# Altium PCB eqVcVersion1.PcbDoc
Units mm, origin at the board's own origin, x right, y up, seen from the top; angles counter-clockwise.
Board outline 185.67 x 159.89 mm, 2 copper layers (Top Layer, Bottom Layer); 127 components, 83 nets, 325 pads, 49 vias.
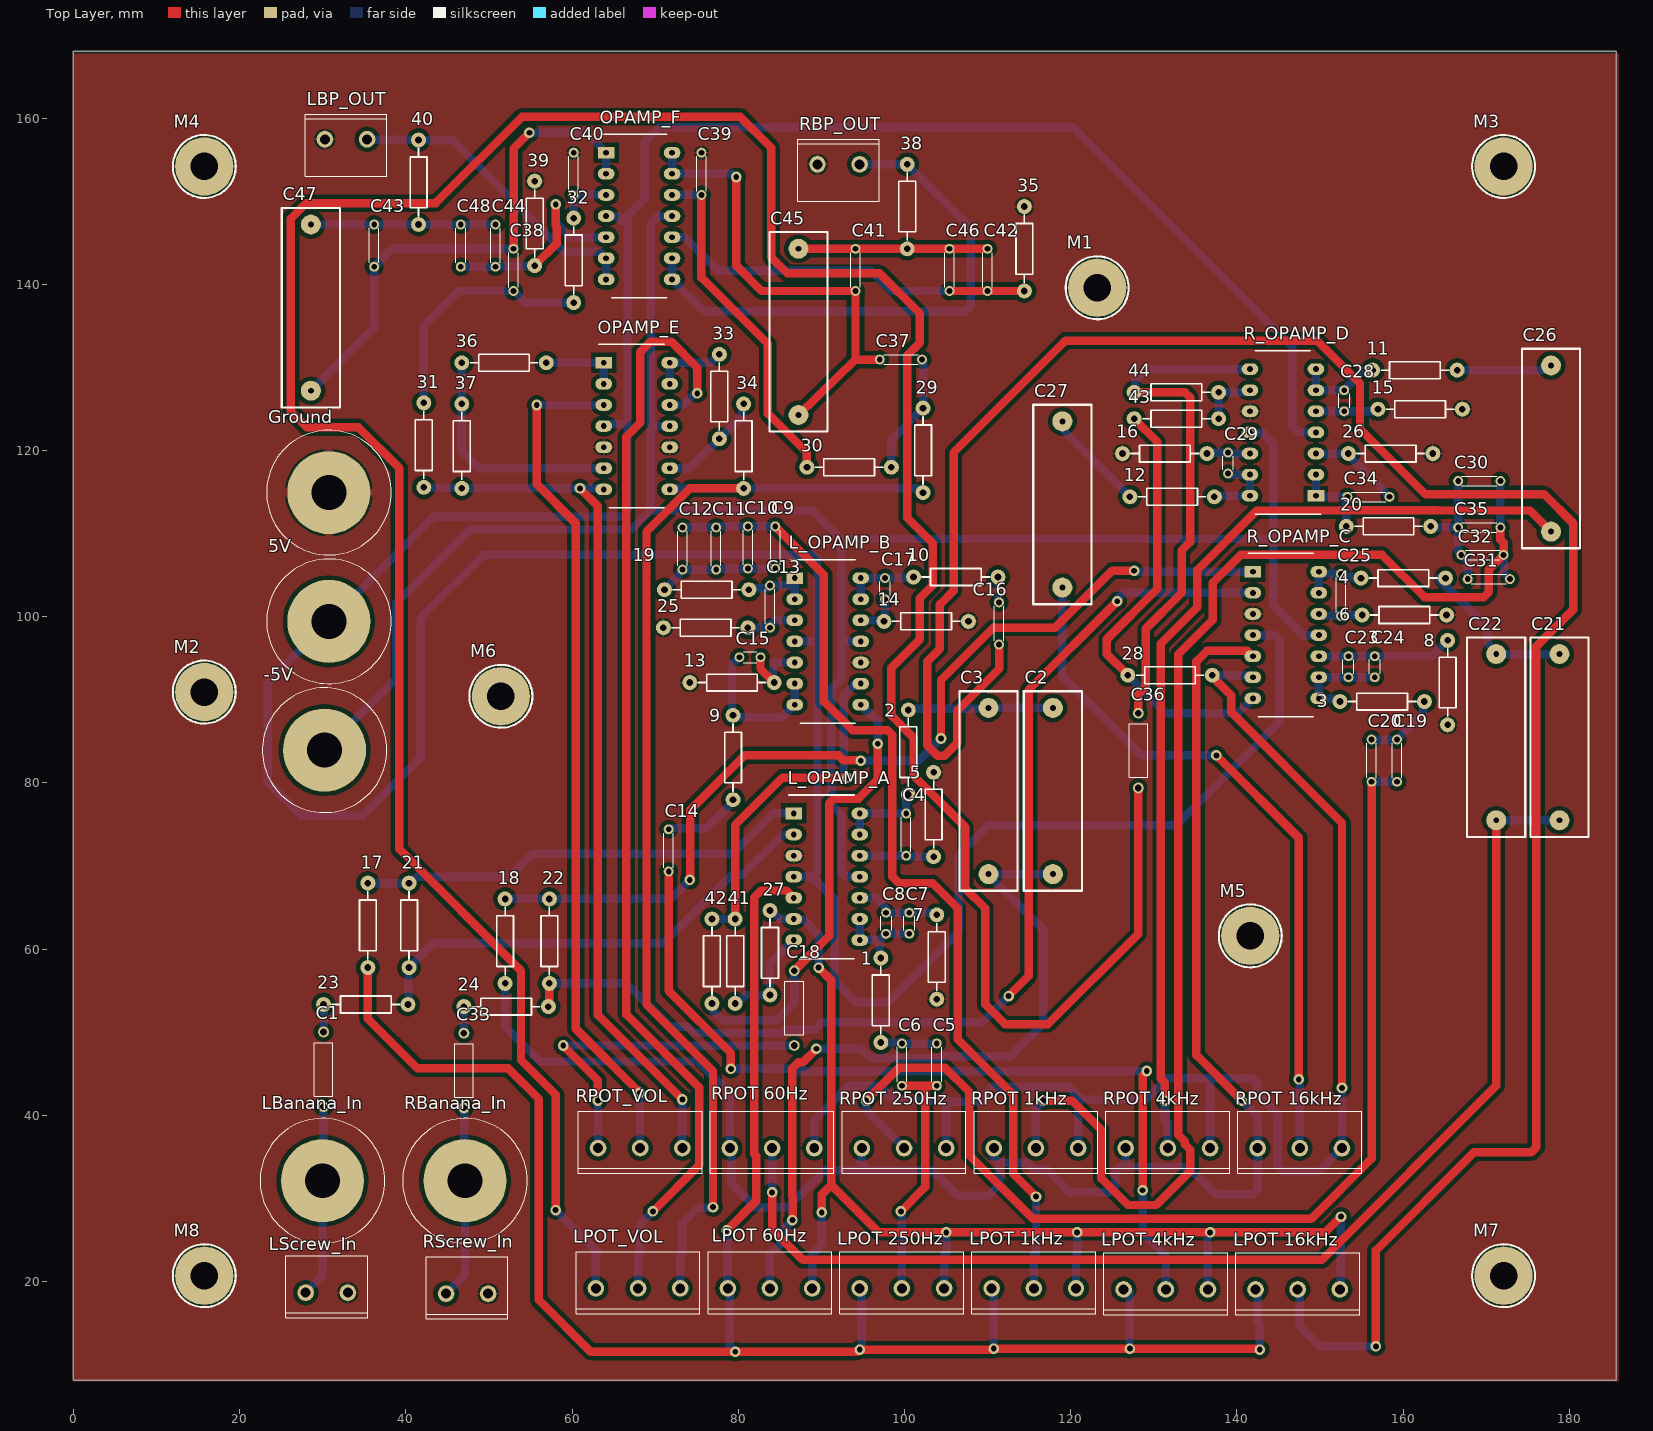
[diagram p0: Top Layer view]
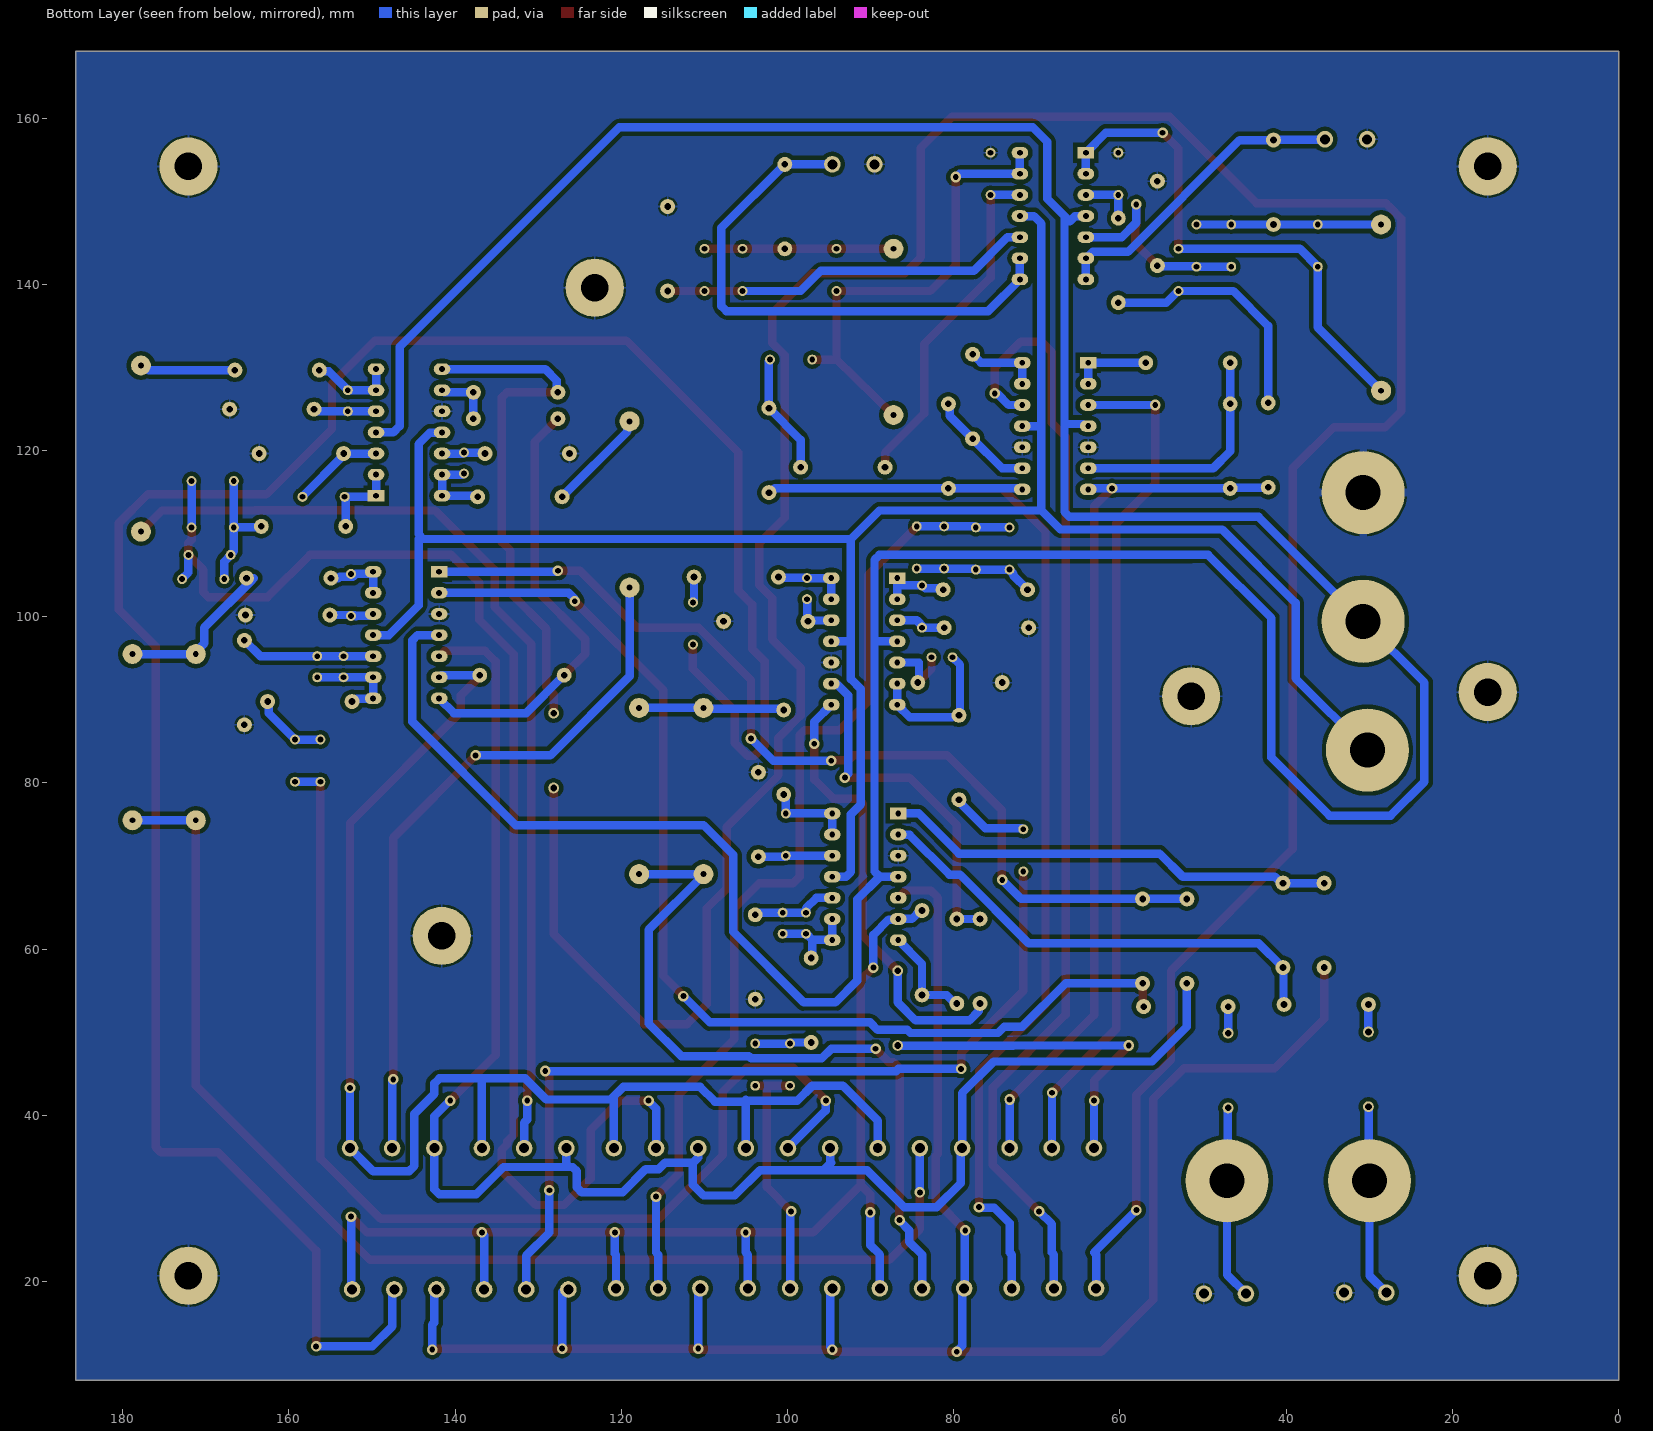
[diagram p1: Bottom Layer view, seen from below]

## Layer stack, top to bottom
Top Solder: solder mask 0.0102, Solder Resist, Dk 3.5
Top Layer: signal copper 0.0356
Dielectric 1: dielectric 0.32, FR-4, Dk 4.8
Bottom Layer: signal copper 0.0356
Bottom Solder: solder mask 0.0102, Solder Resist, Dk 3.5

## Board outline
0,8.128 185.674,8.128 185.674,168.021 0,168.021

## Design rules (kind name [scope] priority, off if disabled: settings)
Clearance [All] p1: gap=0.508 ignorepadtopadclearanceinfootprint=FALSE
PolygonConnect [All] p1: connectstyle=Relief reliefconductorwidth=0.254 reliefentries=4 polygonreliefangle="90 Angle" airgapwidth=0.254
RoutingVias [All] p1: holewidth=0.711 width=1.27 viastyle="Through Hole" minholewidth=0.711 minwidth=1.27 maxholewidth=0.711 maxwidth=1.27
SolderMaskExpansion [All] p1: expansion=0.102 istentingtop=FALSE
Width [All] p1: maxlimit=1.016 minlimit=1.016 preferedwidth=1.016 minimp=50.000000 maximp=50.000000 favimp=50.000000
30 further rules are at their usual default settings.

## Classes and differential pairs
component class voltageControl: 29 30 31 32 33 34 35 36 37 38 39 40 C37 C38 C39 C40 C41 C42 C43 C44 C45 C46 C47 C48 LBP_OUT LPOT_VOL OPAMP_E OPAMP_F RBP_OUT RPOT_VOL
component class equalizer: 1 2 3 4 5 5V 6 7 8 9 10 11 12 13 14 15 16 17 18 19 20 21 22 23 24 25 26 27 28 41 42 43 44 -5V C1 C2 C3 C4 C5 C6 C7 C8 C9 C10 C11 C12 C13 C14 C15 C16 C17 C18 C19 C20 C21 C22 C23 C24 C25 C26 C27 C28 C29 C30 C31 C32 C33 C34 C35 C36 Ground L_OPAMP_A L_OPAMP_B LBanana_In "LPOT 1kHz" "LPOT 4kHz" "LPOT 16kHz" "LPOT 60Hz" "LPOT 250Hz" LScrew_In M1 M2 M3 M4 M5 M6 M7 M8 R_OPAMP_C R_OPAMP_D RBanana_In "RPOT 1kHz" "RPOT 4kHz" "RPOT 16kHz" "RPOT 60Hz" "RPOT 250Hz" RScrew_In

## Components (designator, comment, footprint, x,y, rotation, side; value= is the part's Value field where it differs from the comment)
1 "Res2" "AXIAL-0.4 PCBK" 97.155,53.848 r90 top value=475
2 "Res2" "AXIAL-0.4 PCBK" 100.457,83.693 r270 top value=475
3 "Res2" "AXIAL-0.4 PCBK" 157.48,89.789 r180 top value=475
4 "Res2" "AXIAL-0.4 PCBK" 160.02,104.648 r180 top value=475
5 "Res2" "AXIAL-0.4 PCBK" 103.505,76.2 r270 top value=100k
5V "Banana Plug" "Banana Plug On top" 30.734,99.441 r0 top
6 "Res2" "AXIAL-0.4 PCBK" 160.147,100.203 r180 top value=100k
7 "Res2" "AXIAL-0.4 PCBK" 103.886,59.055 r90 top value=100k
8 "Res2" "AXIAL-0.4 PCBK" 165.354,92.075 r90 top value=100k
9 "475" "AXIAL-0.4 PCBK" 79.375,83.058 r90 top value=100
10 "Res2" "AXIAL-0.4 PCBK" 106.172,104.775 r180 top value=475
11 "Res2" "AXIAL-0.4 PCBK" 161.417,129.667 r180 top value=475
12 "Res2" "AXIAL-0.4 PCBK" 132.207,114.427 r0 top value=475
13 "Res2" "AXIAL-0.4 PCBK" 79.248,92.075 r0 top value=100k
14 "Res2" "AXIAL-0.4 PCBK" 102.616,99.441 r180 top value=100k
15 "Res2" "AXIAL-0.4 PCBK" 162.052,124.968 r180 top value=100k
16 "Res2" "AXIAL-0.4 PCBK" 131.318,119.634 r0 top value=100k
17 "Res2" "AXIAL-0.4 PCBK" 35.433,62.865 r270 top value=100
18 "Res2" "AXIAL-0.4 PCBK" 51.943,60.96 r270 top value=3.32k
19 "Res2" "AXIAL-0.4 PCBK" 76.2,103.251 r0 top value=475
20 "Res2" "AXIAL-0.4 PCBK" 158.242,110.871 r180 top value=475
21 "Res2" "AXIAL-0.4 PCBK" 40.386,62.865 r90 top value=100k
22 "Res2" "AXIAL-0.4 PCBK" 57.277,60.96 r90 top value=100k
23 "Res2" "AXIAL-0.4 PCBK" 35.179,53.34 r0 top value=100k
24 "Res2" "AXIAL-0.4 PCBK" 52.07,53.086 r0 top value=100k
25 "Res2" "AXIAL-0.4 PCBK" 76.073,98.679 r0 top value=100k
26 "Res2" "AXIAL-0.4 PCBK" 158.496,119.634 r180 top value=100k
27 "Res2" "AXIAL-0.4 PCBK" 83.82,59.563 r270 top value=3.32k
28 "Res2" "AXIAL-0.4 PCBK" 131.953,92.964 r180 top value=3.32k
29 "Res2" "AXIAL-0.4 PCBK" 102.235,120.015 r90 top value=3.92k
30 "Res2" "AXIAL-0.4 PCBK" 93.345,117.983 r180 top value=7.32k
31 "Res2" "AXIAL-0.4 PCBK" 42.164,120.65 r90 top value=3.92k
32 "Res2" "AXIAL-0.4 PCBK" 60.198,142.875 r90 top value=7.32k
33 "Res2" "AXIAL-0.4 PCBK" 77.724,126.492 r270 top value=1k
34 "Res2" "AXIAL-0.4 PCBK" 80.645,120.523 r270 top value=649
35 "Res2" "AXIAL-0.4 PCBK" 114.427,144.272 r270 top value=7.87k
36 "Res2" "AXIAL-0.4 PCBK" 51.816,130.556 r180 top value=1k
37 "Res2" "AXIAL-0.4 PCBK" 46.736,120.523 r270 top value=649
38 "Res2" "AXIAL-0.4 PCBK" 100.33,149.352 r90 top value=3.92k
39 "Res2" "AXIAL-0.4 PCBK" 55.499,147.32 r270 top value=7.87k
40 "Res2" "AXIAL-0.4 PCBK" 41.529,152.273 r90 top value=3.92k
41 "Res2" "AXIAL-0.4 PCBK" 79.629,58.547 r90 top value=200
42 "Res2" "AXIAL-0.4 PCBK" 76.835,58.547 r270 top value=100
43 "Res2" "AXIAL-0.4 PCBK" 132.715,123.825 r0 top value=200
44 "Res2" "AXIAL-0.4 PCBK" 132.715,127 r180 top value=100
-5V "Banana Plug" "Banana Plug On top" 30.226,83.947 r0 top
C1 "Cap" "RES THT 9mm" 30.099,50.038 r270 top
C2 "Cap" "Cap 20mm" 117.856,69.027 r90 top
C3 "Cap" "Cap 20mm" 110.109,69.027 r90 top
C4 "Cap" Cap-1 100.203,71.247 r90 top
C5 "Cap" Cap-1 103.886,48.641 r270 top
C6 "Cap" Cap-1 99.695,48.641 r270 top
C7 "Cap" Cap-0 100.584,64.389 r270 top
C8 "Cap" Cap-0 97.79,64.389 r270 top
C9 "Cap" Cap-1 84.455,110.871 r270 top
C10 "Cap" Cap-1 81.153,110.871 r270 top
C11 "Cap" Cap-1 77.343,110.744 r270 top
C12 "Cap" Cap-1 73.279,110.744 r270 top
C13 "Cap" Cap-1 83.82,98.679 r90 top
C14 "Cap" Cap-1 71.628,69.342 r90 top
C15 "Cap" Cap-0 82.677,95.123 r180 top
C16 "Cap" Cap-1 111.379,96.647 r90 top
C17 "Cap" Cap-0 97.663,102.108 r90 top
C18 "Cap" "RES THT 9mm" 86.741,48.404 r90 top
C19 "Cap" Cap-1 159.258,85.217 r270 top
C20 "Cap" Cap-1 156.21,85.217 r270 top
C21 "Cap" "Cap 20mm" 178.816,75.504 r90 top
C22 "Cap" "Cap 20mm" 171.196,75.504 r90 top
C23 "Cap" Cap-0 153.416,95.25 r270 top
C24 "Cap" Cap-0 156.591,95.25 r270 top
C25 "Cap" Cap-1 152.527,100.076 r90 top
C26 "Cap" "Cap 20mm" 177.8,110.236 r90 top
C27 "Cap" "Cap 20mm" 118.999,103.505 r90 top
C28 "Cap" Cap-0 152.908,124.714 r90 top
C29 "Cap" Cap-0 138.938,119.761 r270 top
C30 "Cap" Cap-1 171.704,116.332 r180 top
C31 "Cap" Cap-1 172.847,104.521 r180 top
C32 "Cap" Cap-1 172.085,107.442 r180 top
C33 "Cap" "RES THT 9mm" 46.99,49.894 r270 top
C34 "Cap" Cap-1 158.369,114.427 r180 top
C35 "Cap" Cap-1 171.704,110.744 r180 top
C36 "Cap" "RES THT 9mm" 128.143,79.392 r90 top
C37 "Cap" Cap-1 102.108,130.937 r180 top
C38 "Cap" Cap-1 52.959,139.192 r90 top
C39 "Cap" Cap-1 75.565,155.829 r270 top
C40 "Cap" Cap-1 60.198,155.829 r270 top
C41 "Cap" Cap-1 94.107,139.192 r90 top
C42 "Cap" Cap-1 109.982,144.272 r270 top
C43 "Cap" Cap-1 36.195,142.113 r90 top
C44 "Cap" Cap-1 50.8,147.193 r270 top
C45 "Cap" "Cap 20mm" 87.249,124.272 r90 top
C46 "Cap" Cap-1 105.41,144.272 r270 top
C47 "Cap" "Cap 20mm" 28.575,127.193 r90 top
C48 "Cap" Cap-1 46.609,147.193 r270 top
Ground "Banana Plug" "Banana Plug On top" 30.734,114.935 r0 top
L_OPAMP_A "TLC274CNE4" DIP14 90.645,68.707 r0 top
L_OPAMP_B "TLC274CNE4" DIP14 90.772,97.028 r0 top
LBanana_In "Banana Plug" "Banana Plug On top" 29.972,32.131 r0 top
LBP_OUT "Screw 2" Screw-2 35.338,157.448 r180 top
"LPOT 1kHz" "Screw 3" Screw-3 110.49,19.177 r0 top
"LPOT 4kHz" "Screw 3" Screw-3 126.365,19.05 r0 top
"LPOT 16kHz" "Screw 3" Screw-3 142.24,19.05 r0 top
"LPOT 60Hz" "Screw 3" Screw-3 78.74,19.177 r0 top
"LPOT 250Hz" "Screw 3" Screw-3 94.615,19.177 r0 top
LPOT_VOL "Screw 3" Screw-3 62.87,19.177 r0 top
LScrew_In "Screw 2" Screw-2 27.945,18.669 r0 top
M1 "Screw Hole" "M3 Hole" 123.19,139.573 r0 top
M2 "Screw Hole" "M3 Hole" 15.748,90.932 r0 top
M3 "Screw Hole" "M3 Hole" 172.085,154.178 r0 top
M4 "Screw Hole" "M3 Hole" 15.748,154.178 r0 top
M5 "Screw Hole" "M3 Hole" 141.605,61.595 r0 top
M6 "Screw Hole" "M3 Hole" 51.435,90.424 r0 top
M7 "Screw Hole" "M3 Hole" 172.085,20.701 r0 top
M8 "Screw Hole" "M3 Hole" 15.748,20.701 r0 top
OPAMP_E "TLC274CNE4" DIP14 67.785,122.936 r0 top
OPAMP_F "TLC274CNE4" DIP14 68.072,148.209 r0 top
R_OPAMP_C "TLC274CNE4" DIP14 145.89,97.79 r0 top
R_OPAMP_D "TLC274CNE4" DIP14 145.542,122.174 r180 top
RBanana_In "Banana Plug" "Banana Plug On top" 47.117,32.131 r0 top
RBP_OUT "Screw 2" Screw-2 94.61,154.432 r180 top
"RPOT 1kHz" "Screw 3" Screw-3 110.744,36.058 r0 top
"RPOT 4kHz" "Screw 3" Screw-3 126.619,36.058 r0 top
"RPOT 16kHz" "Screw 3" Screw-3 142.494,36.058 r0 top
"RPOT 60Hz" "Screw 3" Screw-3 78.994,36.058 r0 top
"RPOT 250Hz" "Screw 3" Screw-3 94.869,36.058 r0 top
RPOT_VOL "Screw 3" Screw-3 63.129,36.068 r0 top
RScrew_In "Screw 2" Screw-2 44.836,18.542 r0 top

## Footprints (in the part's own frame and the unit in brackets; to place one, negate y for a bottom-side part, rotate by r counter-clockwise, add the part's x,y. Pads: shape width x height; smd on the part's side, far side on the other; paste and mask are expansions set on the pad)
"AXIAL-0.4 PCBK" [mm]
  round 1.8 hole 0.8: 1(-5.08,0) 2(5.08,0)
  silkscreen extent -4.06,-1.02 4.06,1.02
"Banana Plug On top" [mm] "Banana Plug"
  round 10 hole 4.2: 1(0,0)
  silkscreen extent -7.5,-7.5 7.5,7.5
"Cap 20mm" [mm] "Capacitor with 20mm hole distance (center)"
  round 2.4 hole 0.7: 1(0,0) 2(20,0)
  silkscreen extent -2,-3.5 22,3.5
Cap-0 [mm] "Capacitor with no space"
  round 1.2 hole 0.7: 1(0,0) 2(2.54,0)
  silkscreen extent 0.45,-0.65 2.1,0.65
Cap-1 [mm] "Capacitor with 1 space"
  round 1.2 hole 0.7: 1(0,0) 2(5.08,0)
  silkscreen extent 0.45,-0.58 4.62,0.58
DIP14 [mm]
  rect 2x1.4 hole 0.7: 1(-3.97,7.62)
  oval 2x1.4 hole 0.7: 2(-3.97,5.08) 3(-3.97,2.54) 4(-3.97,0) 5(-3.97,-2.54) 6(-3.97,-5.08) 7(-3.97,-7.62) 8(3.97,-7.62) 9(3.97,-5.08) 10(3.97,-2.54) 11(3.97,0) 12(3.97,2.54) 13(3.97,5.08) 14(3.97,7.62)
  silkscreen extent -4.53,-9.84 3.3,9.84
"M3 Hole" [mm]
  round 7 hole 3.3 mask+0: 1(0,0)
  silkscreen extent -3.78,-3.78 3.79,3.78
"RES THT 9mm" [mm]
  round 1.3 hole 0.8: 1(0,0) 2(9,0)
  silkscreen extent 1.27,-1.13 7.73,1.13, body extent -0.32,-1.13 9.28,1.14, height 2.36
Screw-2 [mm] "Screw Terminal with 2 connections"
  round 2 hole 1.2: 1(0,0) 2(5.075,0)
  silkscreen extent -2.38,-3.02 7.45,4.42, body extent -3.07,-3.1 7.53,4.5, height 10
Screw-3 [mm] "Screw Terminal with 3 connections"
  round 2 hole 1.2: 1(0,0) 2(5.075,0) 3(10.15,0)
  silkscreen extent -2.38,-3.02 12.52,4.42, body extent -2.95,-3.8 12.55,4, height 10.3

## Part data
1 2 3 4 5 6 7 8 9 10 11 12 13 14 15 16 17 18 19 20 21 22 23 24 25 26 27 28 29 30 31 32 33 34 35 36 37 38 39 40 41 42 43 44: library part "Res PCBK", "Resistor", LatestRevisionDate=17-Jul-2002, LatestRevisionNote="Re-released for DXP Platform.", PackageReference=AXIAL-0.4, Published=8-Jun-2000, Publisher="Altium Limited"
C1 C18 C33 C36: library part "Capacitor Polarised", Capacity=10uF
C2 C3 C21 C22: library part "Capacitor big ceramic", Capacity=3.3uF
C4 C16 C25: library part "Capacitor 1 space", Capacity=22nF
C5 C19 C42 C44: library part "Capacitor 1 space", Capacity=1uF
C6 C20: library part "Capacitor 1 space", Capacity=680nF
C7 C23: library part "Capacitor 0 space", Capacity=4.7nF
C8 C24: library part "Capacitor 0 space", Capacity=1nF
C9 C10 C11 C12 C14 C30 C31 C32 C35: library part "Capacitor 1 space", Capacity=100nF
C13 C34: library part "Capacitor 1 space", Capacity=1.2nF
C15 C28: library part "Capacitor 0 space", Capacity=390pF
C17 C29: library part "Capacitor 0 space", Capacity=85pF
C26: library part "Capacitor big ceramic", Capacity=100nF
C27: library part "Capacitor big ceramic", Capacity=22nF
C37 C38: library part "Capacitor 1 space", Capacity=2.2nF
C39 C40: library part "Capacitor 1 space", Capacity=1nF
C41 C43: library part "Capacitor 1 space", Capacity=1.5uF
C45 C47: library part "Capacitor big ceramic", Capacity=330nF
C46 C48: library part "Capacitor 1 space", Capacity=220nF
L_OPAMP_A L_OPAMP_B OPAMP_E OPAMP_F R_OPAMP_C R_OPAMP_D: "Precision Amplifiers Quad Single Supply Op Amp", Manufacturer_Name="Texas Instruments", Mouser Part Number=595-TLC274CNE4, Datasheet Link=https://www.ti.com/lit/ds/symlink/tlc274.pdf?ts=1639464334605&ref_url=https%253A%252F%252Fwww.ti.com%252Fstore%252Fti%252Fen%252Fp%252Fproduct%252F%253Fp%253DTLC274CN, Geometry.Height=5.08mm, Manufacturer_Part_Number=TLC274CNE4, Mouser Price/Stock=https://www.mouser.co.uk/ProductDetail/Texas-Instruments/TLC274CNE4?qs=Mkt%2FZhxPIiTvMsNXR1cCkw%3D%3D

## Via types
v1: diameter 1.27, hole 0.7, Top Layer to Bottom Layer, 49 vias

## Nets (pads, with @x,y where several pads share a name; then routed paths per layer and width w, separated by ;. In a path a pad name is that pad's centre, name@x,y a point inside that pad or via, vN(x,y) a via of type N, cw(c..) or ccw(c..) an arc to the next point about the centre after c; other vN are vias at no path point)
5V: 5V.1 L_OPAMP_A.4 L_OPAMP_B.4 OPAMP_E.4 OPAMP_F.4 R_OPAMP_C.4 R_OPAMP_D.4 | length 453
  Bottom Layer w1.016: OPAMP_E.4 64.219,122.936 64.473,123.19 66.548,123.19 66.675,123.317 ; OPAMP_F.4@63.997,148.187 65.427,148.187 66.04,147.574 66.675,148.209 ; L_OPAMP_A.4 88.9,68.707 ; L_OPAMP_B.4 89.281,97.028 89.535,97.282 ; R_OPAMP_C.4 144.526,97.79 145.161,97.155 145.161,87.376 132.715,74.93 110.109,74.93 106.553,71.374 106.553,62.103 98.044,53.594 94.234,53.594 91.63,56.197 91.63,65.977 88.9,68.707 ; R_OPAMP_D.4 147.447,122.174 146.685,122.936 146.685,132.461 120.269,158.877 70.485,158.877 68.766,157.158 68.766,150.3 66.675,148.209 ; 66.675,123.317 66.675,112.609 66.08,112.014 43.307,112.014 5V.1 23.368,92.075 23.368,80.137 27.432,76.073 34.798,76.073 41.783,83.058 41.783,99.822 49.399,107.438 51.304,107.438 51.308,107.442 88.94,107.442 89.535,106.847 89.535,97.282 ; 66.675,123.317 66.675,148.209 ; 88.9,68.707 89.535,69.342 89.535,97.282
-5V: -5V.1 L_OPAMP_A.11 L_OPAMP_B.11 OPAMP_E.11 OPAMP_F.11 R_OPAMP_C.11 R_OPAMP_D.11 | length 248.3
  Bottom Layer w1.016: -5V.1 38.862,92.583 38.862,101.666 47.686,110.49 67.17,110.49 69.456,112.776 ; OPAMP_E.11 69.837,122.936 69.456,122.555 ; OPAMP_F.11 70.358,148.209 69.456,147.307 69.456,122.936 69.456,122.555 ; L_OPAMP_A.11 92.964,68.707 92.369,69.302 92.369,76.234 91.186,77.416 91.186,91.313 92.369,92.496 92.369,97.028 ; L_OPAMP_B.11 92.369,97.028 ; R_OPAMP_D.11 141.594,122.152 143.024,122.152 144.399,120.777 144.399,109.942 144.101,109.645 ; R_OPAMP_C.11 147.955,97.79 144.399,101.346 144.399,109.347 92.369,109.347 ; 69.456,112.776 69.456,122.555 ; 69.456,112.776 88.94,112.776 92.369,109.347 ; 92.369,97.028 92.369,109.347
GND: 5.1 6.1 7.1 8.1 13.1 14.1 15.1 16.1 25.1 26.1 35.1 39.1 C39.1 C40.1 Ground.1 L_OPAMP_A.3 L_OPAMP_B.10 LBP_OUT.2 LScrew_In.2 M1.1 M2.1 M3.1 M4.1 M5.1 M6.1 M7.1 M8.1 OPAMP_E.5 OPAMP_E.10 R_OPAMP_C.3 R_OPAMP_D.10 RBP_OUT.2 RScrew_In.2
L1BP_IN+: 32.2 C40.2 OPAMP_F.3 | length 6.7
  Bottom Layer w1.016: 32.2 C40.2 OPAMP_F.3
L1BP_OUT: C38.2 C43.1 C47.1 OPAMP_F.1 OPAMP_F.2 | length 63.3
  Top Layer w1.016: C38.2 52.959,156.337 v1(54.864,158.242)
  Bottom Layer w1.016: C47.1 36.195,134.813 C43.1 38.354,144.272 C38.2 ; v1(54.864,158.242) 61.689,158.242 OPAMP_F.1 OPAMP_F.2
L1kHz: 19.2 C13.2 L_OPAMP_B.1 L_OPAMP_B.2 | length 8.3
  Bottom Layer w1.016: 19.2 81.43,103.401 83.412,103.401 83.77,103.759 C13.2 86.802,103.759 ; L_OPAMP_B.2 86.802,103.759 ; L_OPAMP_B.1 86.802,103.759
L1kHz+: 25.2 C13.1 L_OPAMP_B.3 | length 6.3
  Bottom Layer w1.016: 25.2 82.474,98.679 C13.1@83.566,98.679 ; C13.1 C13.1@83.566,98.679 ; L_OPAMP_B.3 84.455,99.568 C13.1@83.566,98.679
L1VOl_IN+: OPAMP_E.3 RPOT_VOL.2 | length 102.6
  Top Layer w1.016: v1(55.753,125.476) 55.753,115.951 60.452,111.252 60.452,50.419 v1(68.161,42.71)
  Bottom Layer w1.016: v1(55.753,125.476) OPAMP_E.3 ; v1(68.161,42.71) 68.18,42.691 68.18,36.077 RPOT_VOL.2
L1VOL_OUT: 36.1 OPAMP_E.1 OPAMP_E.2 | length 9.5
  Bottom Layer w1.016: 36.1 OPAMP_E.1 OPAMP_E.2
L2BP_IN+: 39.2 C44.2 C48.2 OPAMP_F.5 | length 26.4
  Top Layer w1.016: 39.2 58.166,144.907 58.166,146.939 58.039,147.066 v1(58.039,149.606)
  Bottom Layer w1.016: C48.2 C44.2 50.835,142.148 55.407,142.148 39.2 ; v1(58.039,149.606) 58.039,147.404 59.774,145.669 OPAMP_F.5
L2BP_OUT: 40.2 LBP_OUT.1 OPAMP_F.6 OPAMP_F.7 | length 37.4
  Top Layer w1.016: LBP_OUT.1 LBP_OUT.1@35.433,157.353
  Bottom Layer w1.016: LBP_OUT.1 35.385,157.401 41.481,157.401 40.2 45.593,157.353 59.044,143.902 63.298,143.902 64.049,143.151 OPAMP_F.6 OPAMP_F.7
L2VOL_IN-: 36.2 37.1 OPAMP_E.6 | length 28.6
  Bottom Layer w1.016: 36.2 37.1 46.736,119.888 48.768,117.856 OPAMP_E.6
L2VOL_OUT: 31.1 37.2 OPAMP_E.7 RPOT_VOL.3 | length 106.2
  Top Layer w1.016: v1(60.96,115.443) 63.119,113.284 63.119,52.07 v1(73.279,41.91)
  Bottom Layer w1.016: 31.1 42.227,115.506 46.672,115.506 37.2 v1(60.96,115.443) 63.657,115.443 63.784,115.316 OPAMP_E.7 ; RPOT_VOL.3 v1(73.279,41.91)
L4kHz: 9.2 C15.2 L_OPAMP_B.6 L_OPAMP_B.7 | length 18.4
  Bottom Layer w1.016: C15.2 79.248,94.234 79.248,87.884 79.352,87.988 80.079,87.988 80.183,87.884 85.278,87.884 L_OPAMP_B.7 L_OPAMP_B.6
L4kHz+: 13.2 C15.1 L_OPAMP_B.5 | length 8.8
  Top Layer w1.016: C15.1 82.677,93.726 13.2
  Bottom Layer w1.016: 13.2 84.178,92.225 84.178,94.488 L_OPAMP_B.5
L16kHz: 10.2 C17.2 L_OPAMP_B.13 L_OPAMP_B.14 | length 8.9
  Bottom Layer w1.016: L_OPAMP_B.13 L_OPAMP_B.14 C17.2 97.698,104.683 101,104.683 10.2
L16kHz+: 14.2 C17.1 L_OPAMP_B.12 | length 5.6
  Bottom Layer w1.016: L_OPAMP_B.12 94.764,99.546 97.431,99.546 14.2 97.628,99.533 97.628,102.073 C17.1
L60Hz: 2.2 C4.2 L_OPAMP_A.13 L_OPAMP_A.14 | length 10.5
  Bottom Layer w1.016: L_OPAMP_A.13 L_OPAMP_A.14 C4.2 100.238,76.362 100.238,78.394 2.2
L60Hz+: 5.2 C4.1 L_OPAMP_A.12 | length 8.9
  Bottom Layer w1.016: L_OPAMP_A.12 C4.1 100.253,71.247 100.38,71.12 5.2
L250Hz: 1.2 C7.2 C8.2 L_OPAMP_A.8 L_OPAMP_A.9 | length 11.1
  Bottom Layer w1.016: L_OPAMP_A.9 L_OPAMP_A.8 94.637,61.109 97,61.109 ; 1.2 97.005,59.078 97.005,61.104 97,61.109 ; C7.2 C8.2 97.74,61.849 97,61.109
L250Hz+: 7.2 C7.1 C8.1 L_OPAMP_A.10 | length 10.4
  Bottom Layer w1.016: L_OPAMP_A.10 96.52,66.167 97.755,64.932 97.755,64.424 C8.1 C7.1 103.632,64.389 7.2
L_IN+: 21.1 23.2 L_OPAMP_A.2 | length 57.4
  Bottom Layer w1.016: 23.2 40.322,53.404 40.322,57.721 21.1 43.307,60.706 70.993,60.706 79.248,68.961 80.518,68.961 85.303,73.746 86.634,73.746 L_OPAMP_A.2
L_OUT: 17.1 21.2 L_OPAMP_A.1 | length 54.7
  Bottom Layer w1.016: 17.1 21.2 40.598,67.945 41.36,68.707 52.451,68.707 55.245,71.501 79.375,71.501 84.201,76.327 L_OPAMP_A.1
LBP_IN: 17.2 "LPOT 1kHz.1" "LPOT 4kHz.1" "LPOT 16kHz.1" "LPOT 60Hz.1" "LPOT 250Hz.1" L_OPAMP_A.5 | length 236.1
  Top Layer w1.016: 17.2 35.433,51.613 41.402,45.644 52.324,45.644 56.007,41.961 56.007,17.78 62.23,11.557 v1(79.629,11.557) 94.292,11.557 94.546,11.811 v1(94.615,11.811) 110.548,11.811 110.675,11.938 v1(110.744,11.938) v1(127.127,11.938) 142.552,11.938 142.679,11.811 v1(142.748,11.811) ; v1(78.613,26.162) 82.169,29.718 82.169,35.107 81.904,35.372 81.904,66.196 82.764,67.056 85.786,67.056 L_OPAMP_A.5
  Bottom Layer w1.016: v1(78.613,26.162) 78.662,26.113 78.662,19.509 78.994,19.177 78.994,12.261 79.629,11.626 v1(79.629,11.557) ; v1(94.615,11.811) 94.615,11.88 94.869,12.134 94.869,19.05 ; v1(110.744,11.938) 110.744,19.177 ; 126.619,19.258 127.127,18.75 v1(127.127,11.938) ; 142.494,19.05 142.494,15.055 142.748,14.801 v1(142.748,11.811)
LBP_OUT: 27.1 "LPOT 1kHz.3" "LPOT 4kHz.3" "LPOT 16kHz.3" "LPOT 60Hz.3" "LPOT 250Hz.3" L_OPAMP_A.6 | length 145
  Top Layer w1.016: v1(89.662,57.785) 89.662,57.78 91.186,56.256 91.186,31.623 ; v1(90.043,28.321) 90.043,30.48 91.186,31.623 ; v1(152.527,27.813) 150.622,25.908 v1(136.779,25.908) v1(120.777,25.908) v1(105.029,25.908) 96.901,25.908 91.186,31.623
  Bottom Layer w1.016: 27.1 84.032,64.643 85.026,63.649 86.653,63.649 L_OPAMP_A.6 86.748,63.554 87.83,63.554 89.662,61.722 v1(89.662,57.785) ; 88.89,19.177 88.89,23.241 90.043,24.394 v1(90.043,28.321) ; 104.765,19.177 104.765,23.241 105.029,23.505 v1(105.029,25.908) ; 120.64,19.177 120.64,23.241 120.777,23.378 v1(120.777,25.908) ; 136.515,19.05 136.515,25.575 136.779,25.839 v1(136.779,25.908) ; 152.527,19.167 152.478,19.216 152.478,27.764 v1(152.527,27.813)
LEndEq-: 41.2 42.1 L_OPAMP_B.9 | length 42.7
  Top Layer w1.016: 41.2 79.566,63.691 79.629,63.754 79.629,74.93 85.344,80.645 v1(93.091,80.645)
  Bottom Layer w1.016: 42.1 41.2 ; v1(93.091,80.645) 93.091,80.714 92.71,81.095 92.71,90.551 94.034,91.875 94.669,91.875 L_OPAMP_B.9
LEndEqOut: 42.2 C18.2 L_OPAMP_B.8 | length 54.6
  Top Layer w1.016: C18.2 90.932,61.595 90.932,77.51 91.527,78.105 94.488,78.105 96.774,80.391 v1(96.774,84.709)
  Bottom Layer w1.016: 42.2 76.985,53.317 76.985,52.555 78.105,51.435 84.582,51.435 86.741,53.594 C18.2 ; L_OPAMP_B.8 96.774,87.376 v1(96.774,84.709)
LEQ_TO_VC: C18.1 RPOT_VOL.1 | length 41.9
  Top Layer w1.016: v1(58.945,48.404) 58.928,48.387 63.119,44.196 v1(63.119,41.783)
  Bottom Layer w1.016: v1(58.945,48.404) 72.828,48.404 72.845,48.387 86.724,48.387 C18.1 ; v1(63.119,41.783) 63.124,41.778 63.124,36.073 RPOT_VOL.1
LOPAMP_OUT: 27.2 41.1 L_OPAMP_A.7 | length 12.4
  Bottom Layer w1.016: 41.1 79.841,53.467 80.857,54.483 27.2 83.82,58.232 L_OPAMP_A.7
Net1_1: 1.1 C5.1 C6.1 | length 6.8
  Bottom Layer w1.016: 1.1 99.518,48.768 99.645,48.641 C6.1 C5.1
Net2_1: 2.1 C2.2 C3.2 | length 17.5
  Bottom Layer w1.016: 2.1 100.584,88.9 109.982,88.9 C3.2 C2.2
Net3_1: 3.1 C19.1 C20.1 | length 9
  Bottom Layer w1.016: C20.1 C19.1 162.41,88.369 162.41,89.639 3.1
Net4_1: 4.1 C21.2 C22.2 | length 19.7
  Bottom Layer w1.016: 4.1@164.211,104.648 164.528,104.331 170.18,98.679 170.18,96.791 171.196,95.775 C22.2 C21.2
Net9_1: 9.1 C14.2 | length 9.2
  Bottom Layer w1.016: C14.2@71.708,74.462 71.713,74.457 71.805,74.549 76.2,74.549 9.1@79.502,77.851
Net10_1: 10.1 C16.2 | length 3.1
  Bottom Layer w1.016: 10.1 111.252,101.904 111.379,101.777 C16.2
Net11_1: 11.1 C26.2 | length 11.5
  Bottom Layer w1.016: 11.1 176.856,129.667 177.426,130.236 C26.2
Net12_1: 12.1 C27.2 | length 12.4
  Bottom Layer w1.016: C27.2 119.264,123.24 119.264,122.29 12.1
Net19_1: 19.1 C9.2 C10.2 C11.2 C12.2 | length 14.5
  Bottom Layer w1.016: 19.1 72.834,104.965 72.834,105.169 73.279,105.614 C12.2 C11.2 77.393,105.664 77.52,105.791 C10.2 C9.2
Net20_1: 20.1 C30.2 C31.2 C32.2 C35.2 | length 15.6
  Bottom Layer w1.016: 20.1 163.414,110.779 166.589,110.779 C35.2 ; C30.2 C35.2 ; C31.2 167.752,104.536 167.752,106.645 167.005,107.392 C32.2 167.005,107.492 166.624,107.873 C35.2
Net23_1: 23.1 C1.1 | length 3.3
  Bottom Layer w1.016: C1.1 23.1
Net24_1: 24.1 C33.1 | length 3.2
  Bottom Layer w1.016: C33.1 24.1
Net29_2: 29.2 30.1 C37.1 | length 14.6
  Bottom Layer w1.016: 30.1 98.425,121.285 29.2 102.235,130.76 102.108,130.887 C37.1
Net31_2: 31.2 32.1 C38.1 | length 29.6
  Bottom Layer w1.016: 31.2 42.164,135.001 46.355,139.192 C38.1 53.009,139.192 54.406,137.795 32.1
Net38_1: 38.1 C41.2 C42.1 C45.2 C46.1 | length 22.7
  Top Layer w1.016: C45.2 C41.2 38.1 C46.1 C42.1
Net40_1: 40.1 C43.2 C44.1 C47.2 C48.1 | length 22.2
  Bottom Layer w1.016: C47.2 C43.2 40.1 C48.1 C44.1
NetC1_2: C1.2 LBanana_In.1 LScrew_In.1 | length 23.3
  Bottom Layer w1.016: LScrew_In.1 29.972,20.696 LBanana_In.1 30.045,32.204 30.045,40.984 C1.2
NetC2_1: "LPOT 60Hz.2" C2.1 C3.1 | length 89.5
  Top Layer w1.016: v1(86.515,27.394) 86.563,27.443 86.563,30.175 86.487,30.251 86.487,45.631 87.249,46.393 87.795,46.393 v1(89.408,48.006)
  Bottom Layer w1.016: 83.815,19.177 83.815,23.241 85.356,24.782 85.356,26.167 86.515,27.326 v1(86.515,27.394) ; v1(89.408,48.006) 94.742,48.006 95.896,46.852 104.382,46.852 104.647,47.117 112.776,47.117 116.713,51.054 116.713,62.335 110.109,68.939 C3.1 C2.1
NetC5_2: "LPOT 250Hz.2" C5.2 C6.2 | length 29.8
  Top Layer w1.016: v1(99.568,28.448) 102.489,31.369 102.489,43.561 ; C6.2 102.489,43.561 ; C5.2 102.489,43.561
  Bottom Layer w1.016: v1(99.568,28.448) 99.568,28.379 99.69,28.257 99.69,19.177
NetC9_1: "LPOT 1kHz.2" C9.1 C10.1 C11.1 C12.1 | length 120.7
  Top Layer w1.016: C9.1 90.297,105.029 90.297,89.789 93.726,86.36 97.957,86.36 98.552,85.765 98.552,79.418 98.541,79.407 98.541,77.819 98.552,77.808 98.552,68.707 99.314,67.945 103.378,67.945 106.426,64.897 106.426,49.149 113.069,42.506 113.069,32.981 v1(115.824,30.226)
  Bottom Layer w1.016: C12.1@73.329,110.744 C11.1@77.293,110.744 ; C11.1@77.393,110.744 77.52,110.871 C10.1 C9.1 ; 115.565,19.177 115.565,23.241 115.824,23.5 v1(115.824,30.226)
NetC14_1: "LPOT 4kHz.2" C14.1 | length 103.9
  Top Layer w1.016: 71.628,68.58 71.628,54.991 79.121,47.498 v1(79.121,45.593) ; v1(128.651,30.988) 128.651,44.762 129.159,45.27 v1(129.159,45.339)
  Bottom Layer w1.016: v1(79.121,45.593) 86.67,45.593 86.935,45.328 129.148,45.328 v1(129.159,45.339) ; v1(128.651,30.988) 128.651,25.903 131.44,23.114 131.44,19.05
NetC16_1: "LPOT 16kHz.2" C16.1 | length 274.9
  Top Layer w1.016: C16.1 111.379,93.726 106.375,88.722 106.375,84.836 104.815,83.276 103.973,83.276 102.743,84.506 102.743,94.615 104.267,96.139 104.267,101.473 105.918,103.124 105.918,119.761 119.38,133.223 149.657,133.223 154.813,128.067 154.813,122.606 162.703,114.716 177.003,114.716 180.467,111.252 180.467,100.863 176.022,96.418 176.022,36.155 175.427,35.56 168.529,35.56 156.718,23.749 v1(156.718,12.192)
  Bottom Layer w1.016: 147.569,18.796 147.569,14.61 149.987,12.192 v1(156.718,12.192)
NetC19_2: "RPOT 250Hz.2" C19.2 C20.2 | length 133.5
  Top Layer w1.016: v1(95.377,41.783) 99.314,45.72 104.902,45.72 107.772,42.85 107.772,35.23 115.443,27.559 148.971,27.559 156.21,34.798 C20.2
  Bottom Layer w1.016: v1(95.377,41.783) 95.426,41.734 95.426,40.576 99.944,36.058 ; C20.2 C19.2
NetC21_1: "RPOT 60Hz.2" C21.1 C22.1 | length 146.7
  Top Layer w1.016: v1(84.074,30.734) 84.069,30.729 84.069,26.294 87.757,22.606 150.241,22.606 171.196,43.561 C22.1
  Bottom Layer w1.016: 84.069,36.058 84.072,36.055 84.072,30.736 v1(84.074,30.734) ; C22.1 C21.1
NetC26_1: "RPOT 4kHz.2" C26.1 | length 118.4
  Top Layer w1.016: v1(131.318,41.783) 131.318,43.942 130.81,44.45 130.81,96.715 135.255,101.16 135.255,105.639 142.392,112.776 152.357,112.776 152.368,112.787 164.116,112.787 164.127,112.776 175.26,112.776 C26.1
  Bottom Layer w1.016: v1(131.318,41.783) 131.318,39.492 131.694,39.116 131.694,36.058
NetC27_1: "RPOT 16kHz.2" C27.1 | length 84.6
  Top Layer w1.016: v1(137.541,83.312) 147.447,73.406 v1(147.447,44.323)
  Bottom Layer w1.016: C27.1 118.999,92.837 128.524,83.312 v1(137.541,83.312) ; v1(147.447,44.323) 147.447,44.254 147.569,44.132 147.569,36.058
NetC30_1: "RPOT 1kHz.2" C30.1 C31.1 C32.1 C35.1 | length 161.6
  Top Layer w1.016: v1(116.713,41.783) 120.142,41.783 123.698,38.227 123.698,32.385 126.873,29.21 130.302,29.21 134.366,33.274 134.366,35.878 133.71,36.534 133.71,36.893 132.969,37.634 132.969,95.491 137.084,99.606 137.084,104.064 140.462,107.442 157.48,107.442 162.56,102.362 169.712,102.362 170.307,102.957 170.307,105.664 C32.1 172.085,108.89 171.704,109.271 C35.1
  Bottom Layer w1.016: 115.819,36.058 115.819,40.82 116.713,41.714 v1(116.713,41.783) ; C35.1 C30.1 ; C32.1 172.1,107.427 172.1,105.318 172.847,104.571 C31.1
NetC33_2: C33.2 RBanana_In.1 RScrew_In.1 | length 23.3
  Bottom Layer w1.016: RScrew_In.1 47.117,20.823 RBanana_In.1 47.044,32.204 47.044,40.84 C33.2
R1BP_IN+: 30.2 C39.2 OPAMP_F.12 | length 41.5
  Top Layer w1.016: C39.2 75.565,140.797 83.566,132.796 83.566,124.443 88.265,119.744 30.2
  Bottom Layer w1.016: OPAMP_F.12 C39.2
R1BP_OUT: C37.2 C41.1 C45.1 OPAMP_F.13 OPAMP_F.14 | length 57.4
  Top Layer w1.016: v1(79.756,152.908) 79.756,142.24 82.804,139.192 C41.1 94.107,130.937 ; C45.1 94.107,130.937 ; C37.2 94.107,130.937
  Bottom Layer w1.016: OPAMP_F.14 OPAMP_F.13 79.306,153.289 79.687,152.908 v1(79.756,152.908)
R1kHz: 20.2 C34.2 R_OPAMP_D.1 R_OPAMP_D.2 | length 10
  Bottom Layer w1.016: R_OPAMP_D.2 R_OPAMP_D.1 149.639,114.427 C34.2 153.289,114.377 153.162,114.25 20.2
R1kHz+: 26.2 C34.1 R_OPAMP_D.3 | length 11.2
  Bottom Layer w1.016: R_OPAMP_D.3 26.2 153.416,119.43 158.369,114.477 C34.1
R1VOl_IN+: LPOT_VOL.2 OPAMP_E.12 | length 135.8
  Top Layer w1.016: v1(69.723,28.448) 75.311,34.036 75.311,43.359 66.548,52.122 66.548,121.666 68.199,123.317 68.199,131.826 69.469,133.096 71.942,133.096 75.057,129.981 v1(75.057,126.873) ; OPAMP_E.12@71.683,125.404 OPAMP_E.12
  Bottom Layer w1.016: LPOT_VOL.2 67.945,23.241 68.199,23.495 68.199,26.919 69.723,28.443 v1(69.723,28.448) ; OPAMP_E.12 73.406,125.476 74.754,126.824 75.008,126.824 v1(75.057,126.873)
R1VOL_OUT: 33.1 OPAMP_E.13 OPAMP_E.14 | length 8.9
  Bottom Layer w1.016: OPAMP_E.13 OPAMP_E.14 71.777,130.578 76.73,130.578 33.1
R2BP_IN+: 35.2 C42.2 C46.2 OPAMP_F.10 | length 45.1
  Top Layer w1.016: C46.2 C42.2 35.2
  Bottom Layer w1.016: OPAMP_F.10 73.533,145.669 77.597,141.605 96.012,141.605 98.425,139.192 C46.2
R2BP_OUT: 38.2 OPAMP_F.8 OPAMP_F.9 RBP_OUT.1 | length 66.2
  Bottom Layer w1.016: OPAMP_F.9 OPAMP_F.8 75.852,136.779 107.355,136.779 107.95,137.374 107.95,146.812 38.2 RBP_OUT.1
R2VOL_IN-: 33.2 34.1 OPAMP_E.9 | length 12.8
  Bottom Layer w1.016: OPAMP_E.9 71.777,117.878 74.19,117.878 33.2 80.495,124.183 80.495,125.453 34.1
R2VOL_OUT: 29.1 34.2 LPOT_VOL.3 OPAMP_E.8 | length 141.6
  Top Layer w1.016: v1(76.962,28.956) 76.962,45.339 68.961,53.34 68.961,110.236 74.168,115.443 34.2
  Bottom Layer w1.016: OPAMP_E.8 71.786,115.316 71.913,115.443 34.2 101.515,115.443 102.023,114.935 29.1 ; LPOT_VOL.3 73.02,23.241 73.274,23.495 73.274,27.046 75.135,28.907 76.913,28.907 v1(76.962,28.956)
R4kHz: 11.2 C28.2 R_OPAMP_D.6 R_OPAMP_D.7 | length 10.4
  Bottom Layer w1.016: R_OPAMP_D.7 R_OPAMP_D.6 C28.2 155.171,129.517 156.187,129.517 11.2
R4kHz+: 15.2 C28.1 R_OPAMP_D.5 | length 7.6
  Bottom Layer w1.016: R_OPAMP_D.5 C28.1 156.718,124.714 15.2
R16kHz: 12.2 C29.2 R_OPAMP_D.13 R_OPAMP_D.14 | length 9.6
  Bottom Layer w1.016: 12.2 137.392,114.532 141.55,114.532 R_OPAMP_D.14 R_OPAMP_D.13 139.115,117.094 138.988,117.221 C29.2
R16kHz+: 16.2 C29.1 R_OPAMP_D.12 | length 5.3
  Bottom Layer w1.016: 16.2 136.49,119.726 138.903,119.726 C29.1 138.988,119.761 139.115,119.634 R_OPAMP_D.12
R60Hz: 4.2 C25.2 R_OPAMP_C.13 R_OPAMP_C.14 | length 7.1
  Bottom Layer w1.016: R_OPAMP_C.13 R_OPAMP_C.14 150.079,105.191 151.907,105.191 C25.2@151.942,105.156 ; 151.892,105.156 C25.2@151.942,105.156 ; 4.2@154.051,104.648 153.901,104.798 152.3,104.798 C25.2@151.942,105.156
R60Hz+: 6.2 C25.1 R_OPAMP_C.12 | length 4.5
  Bottom Layer w1.016: R_OPAMP_C.12 149.891,100.33 150.11,100.111 151.857,100.111 151.892,100.076 151.942,100.076 152.069,100.203 6.2@154.178,100.203
R250Hz: 3.2 C23.2 C24.2 R_OPAMP_C.8 R_OPAMP_C.9 | length 12
  Bottom Layer w1.016: 3.2 152.188,89.789 151.829,90.148 149.882,90.148 R_OPAMP_C.8 R_OPAMP_C.9 C23.2 C24.2
R250Hz+: 8.2 C23.1 C24.1 R_OPAMP_C.10 | length 16.3
  Bottom Layer w1.016: R_OPAMP_C.10 C23.1 C24.1 163.449,95.25 8.2
R_IN+: 22.1 24.2 R_OPAMP_C.2 | length 132.2
  Top Layer w1.016: 24.2 57.277,53.213 22.1 ; v1(112.522,54.356) 114.935,56.769 114.935,91.186 v1(125.603,101.854)
  Bottom Layer w1.016: 22.1 66.548,55.88 71.755,50.673 73.914,50.673 74.676,49.911 85.213,49.911 85.594,50.292 89.154,50.292 90.043,51.181 109.347,51.181 v1(112.522,54.356) ; v1(125.603,101.854) 125.652,101.903 125.652,102.196 126.325,102.87 R_OPAMP_C.2
R_OUT: 18.1 22.2 R_OPAMP_C.1 | length 115.9
  Top Layer w1.016: v1(74.168,68.326) 74.217,68.375 74.217,76.757 80.772,83.312 92.075,83.312 92.661,82.726 94.693,82.726 v1(94.742,82.677) ; v1(104.394,85.344) 104.394,92.369 110.704,98.679 118.139,98.679 124.997,105.537 v1(127.635,105.537)
  Bottom Layer w1.016: 18.1 71.882,66.04 v1(74.168,68.326) ; v1(94.742,82.677) 101.727,82.677 v1(104.394,85.344) ; v1(127.635,105.537) 127.704,105.537 127.831,105.41 R_OPAMP_C.1
RBP_IN: 18.2 "RPOT 1kHz.1" "RPOT 4kHz.1" "RPOT 16kHz.1" "RPOT 60Hz.1" "RPOT 250Hz.1" R_OPAMP_C.5 | length 204.5
  Top Layer w1.016: v1(140.589,41.783) 135.128,47.244 135.128,92.159 135.117,92.17 135.117,93.758 135.128,93.769 135.128,94.615 136.398,95.885 141.268,95.885 141.903,95.25 R_OPAMP_C.5
  Bottom Layer w1.016: 18.2 51.943,50.673 56.134,46.482 75.184,46.482 78.994,42.672 78.994,36.058 79.182,35.869 79.182,31.816 82.042,28.956 85.979,28.956 90.424,33.401 95.642,33.401 ; 94.869,36.058 94.869,34.417 94.748,34.296 95.642,33.401 ; 110.744,36.058 110.744,34.931 111.379,34.296 ; 126.238,33.782 126.619,34.163 126.619,36.058 ; v1(140.589,41.783) 140.627,41.783 142.494,39.916 142.494,36.058 142.494,31.075 141.899,30.48 137.475,30.48 134.173,33.782 126.619,33.782 125.857,33.782 125.349,33.274 125.349,31.329 124.754,30.734 119.847,30.734 117.053,33.528 115.498,33.528 114.73,34.296 111.379,34.296 ; 95.642,33.401 103.314,33.401 106.362,30.353 110.109,30.353 111.379,31.623 111.379,34.296
RBP_OUT: 28.1 "RPOT 1kHz.3" "RPOT 4kHz.3" "RPOT 16kHz.3" "RPOT 60Hz.3" "RPOT 250Hz.3" R_OPAMP_C.6 | length 170.6
  Top Layer w1.016: 28.1 137.033,92.821 139.319,90.535 139.319,88.519 152.644,75.194 v1(152.644,43.307)
  Bottom Layer w1.016: 89.144,36.058 89.144,39.36 93.345,43.561 97.028,43.561 98.806,41.783 104.892,41.783 105.019,41.91 105.019,36.058 ; 105.019,41.656 108.734,41.656 110.512,43.434 119.761,43.434 121.285,41.91 ; 120.894,36.058 120.894,41.91 129.032,41.91 131.5,44.378 ; 131.572,44.45 136.776,44.45 136.776,36.064 136.769,36.058 ; 136.877,44.45 141.899,44.45 142.494,43.855 142.494,42.601 144.907,40.188 144.907,33.909 145.542,33.274 149.86,33.274 152.644,36.058 v1(152.644,43.307) ; 28.1 141.635,92.964 141.889,92.71 R_OPAMP_C.6
REndEq-: 43.2 44.1 R_OPAMP_D.9 | length 7.1
  Bottom Layer w1.016: 43.2 44.1 141.287,127 141.541,127.254 R_OPAMP_D.9
REndEqOut: 44.2 C36.2 R_OPAMP_D.8 | length 63.4
  Top Layer w1.016: 44.2 133.771,127 134.366,126.405 134.366,108.966 133.35,107.95 133.35,102.87 129.032,98.552 129.032,91.567 128.143,90.678 C36.2
  Bottom Layer w1.016: 44.2 127.785,127.15 127.785,128.42 129.159,129.794 R_OPAMP_D.8
REQ_TO_VC: C36.1 LPOT_VOL.1 | length 379.3
  Top Layer w1.016: v1(58.014,28.605) 58.014,42.494 53.859,46.649 53.859,57.393 39.218,72.034 39.218,117.856 34.265,122.809 28.067,122.809 26.162,124.714 26.162,147.914 27.657,149.409 27.667,149.409 28.016,149.758 43.586,149.758 53.975,160.147 80.239,160.147 83.947,156.439 83.947,143.256 85.903,141.3 97.028,141.3 101.854,136.474 101.854,132.968 100.319,131.433 100.319,123.603 100.341,123.581 100.341,117.189 100.319,117.167 100.319,111.919 103.378,108.86 103.378,103.759 101.854,102.235 101.854,97.282 98.425,93.853 98.425,88.095 101.092,85.428 101.092,80.899 107.315,74.676 107.315,67.31 109.728,64.897 109.728,53.34 112.09,50.978 117.272,50.978 128.143,61.849 C36.1
  Bottom Layer w1.016: v1(58.014,28.605) 63.124,23.495 62.87,23.241 LPOT_VOL.1
ROPAMP_OUT: 28.2 43.1 R_OPAMP_C.7 | length 53.3
  Top Layer w1.016: 28.2 124.333,95.504 124.333,97.282 130.429,103.378 130.429,121.031 43.1
  Bottom Layer w1.016: 28.2 131.445,88.392 140.142,88.392 R_OPAMP_C.7

## Polygon pours and split planes (outlines as drawn)
GND on Bottom Layer "GND_L02_P003" (solid, pour order 3): 0,168.021 185.674,168.021 185.674,8.128 0,8.128
GND on Top Layer "GND_L01_P004" (solid, pour order 4): 0,167.767 185.928,167.767 185.928,8.001 0,8.001